# Altium PCB PCB_Main.PcbDoc
Units mm, origin at the board's own origin, x right, y up, seen from the top; angles counter-clockwise.
Board outline 70 x 60 mm, 2 copper layers (Top Layer, Bottom Layer); 12 components, 15 nets, 80 pads, 6 vias.
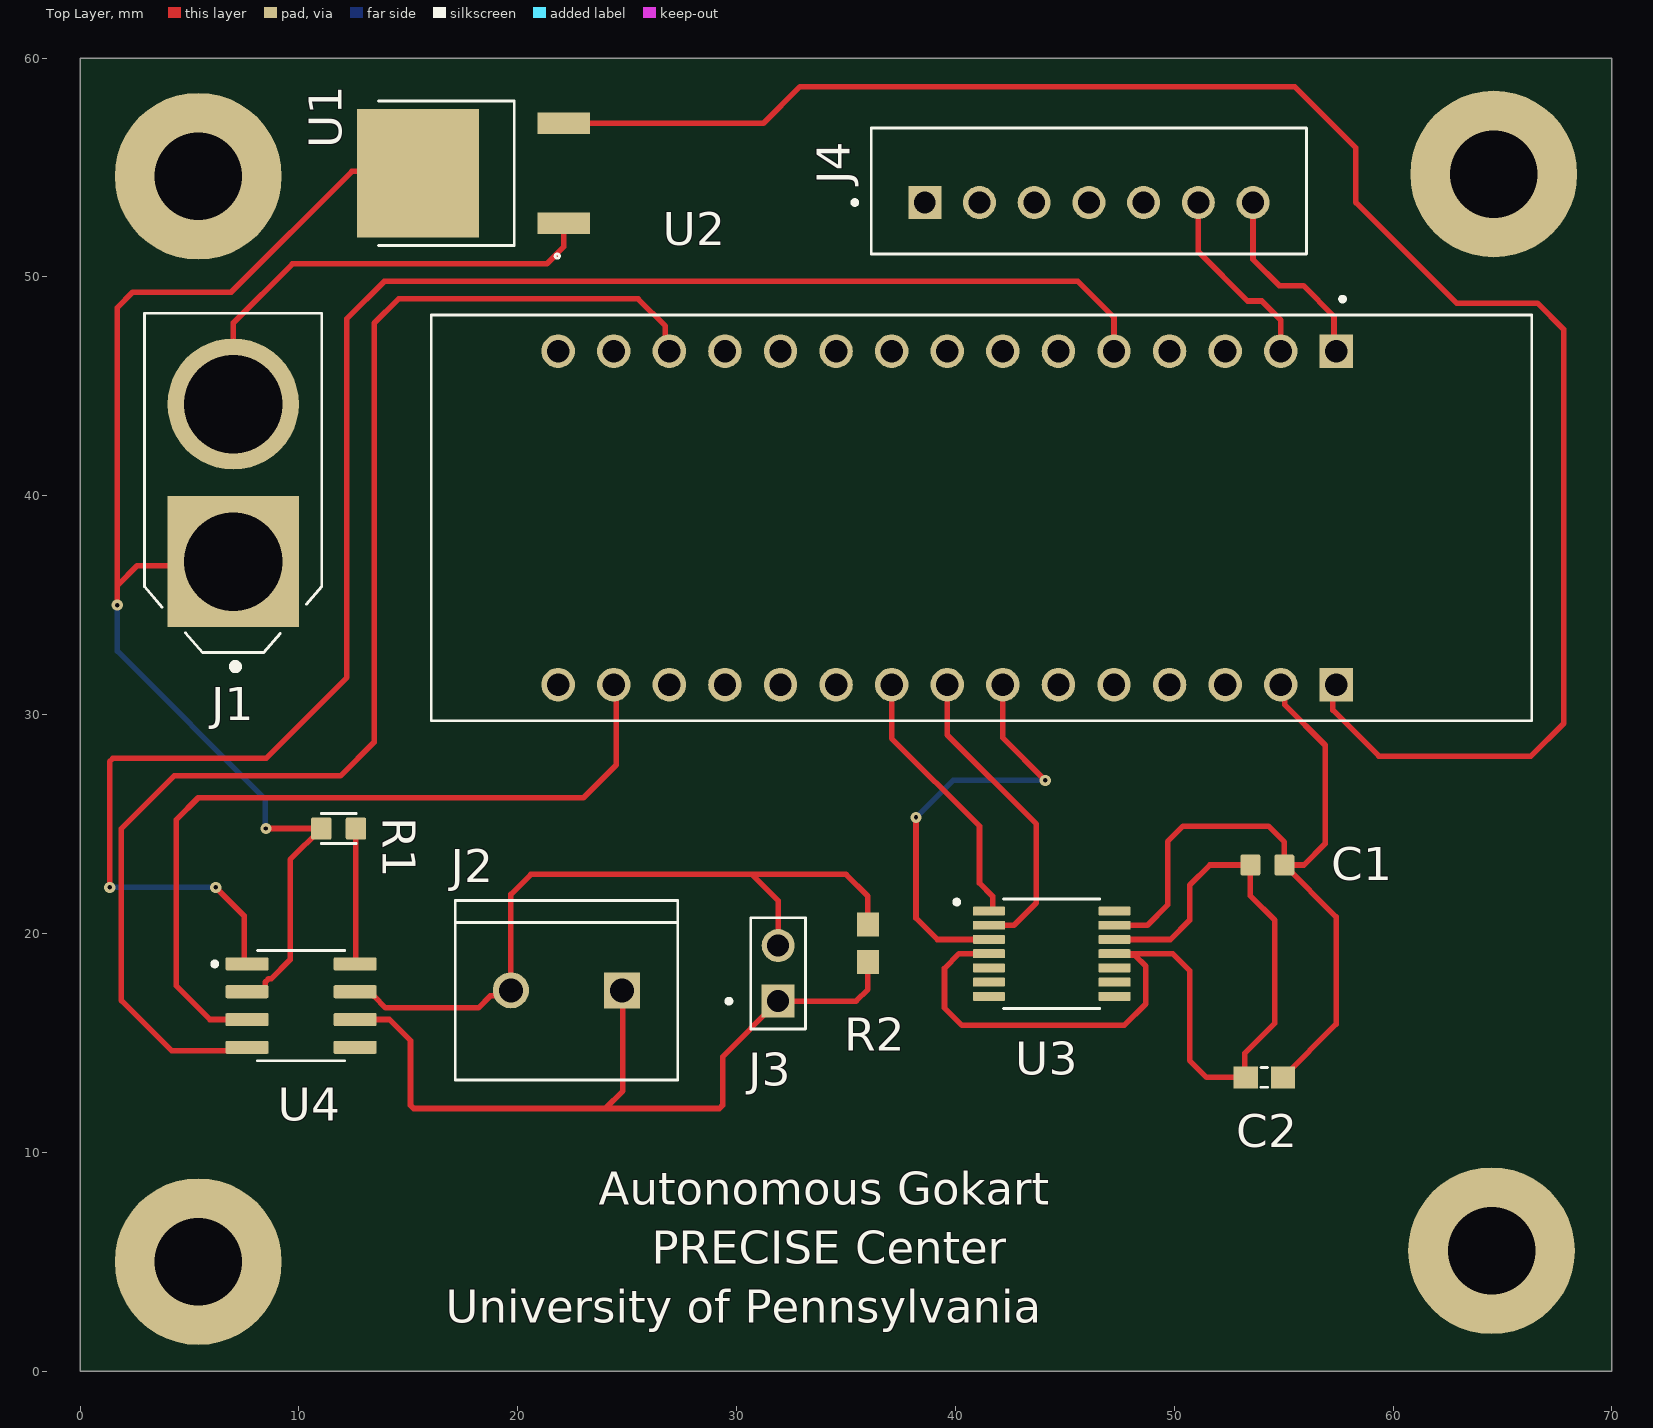
[diagram p0: Top Layer view]
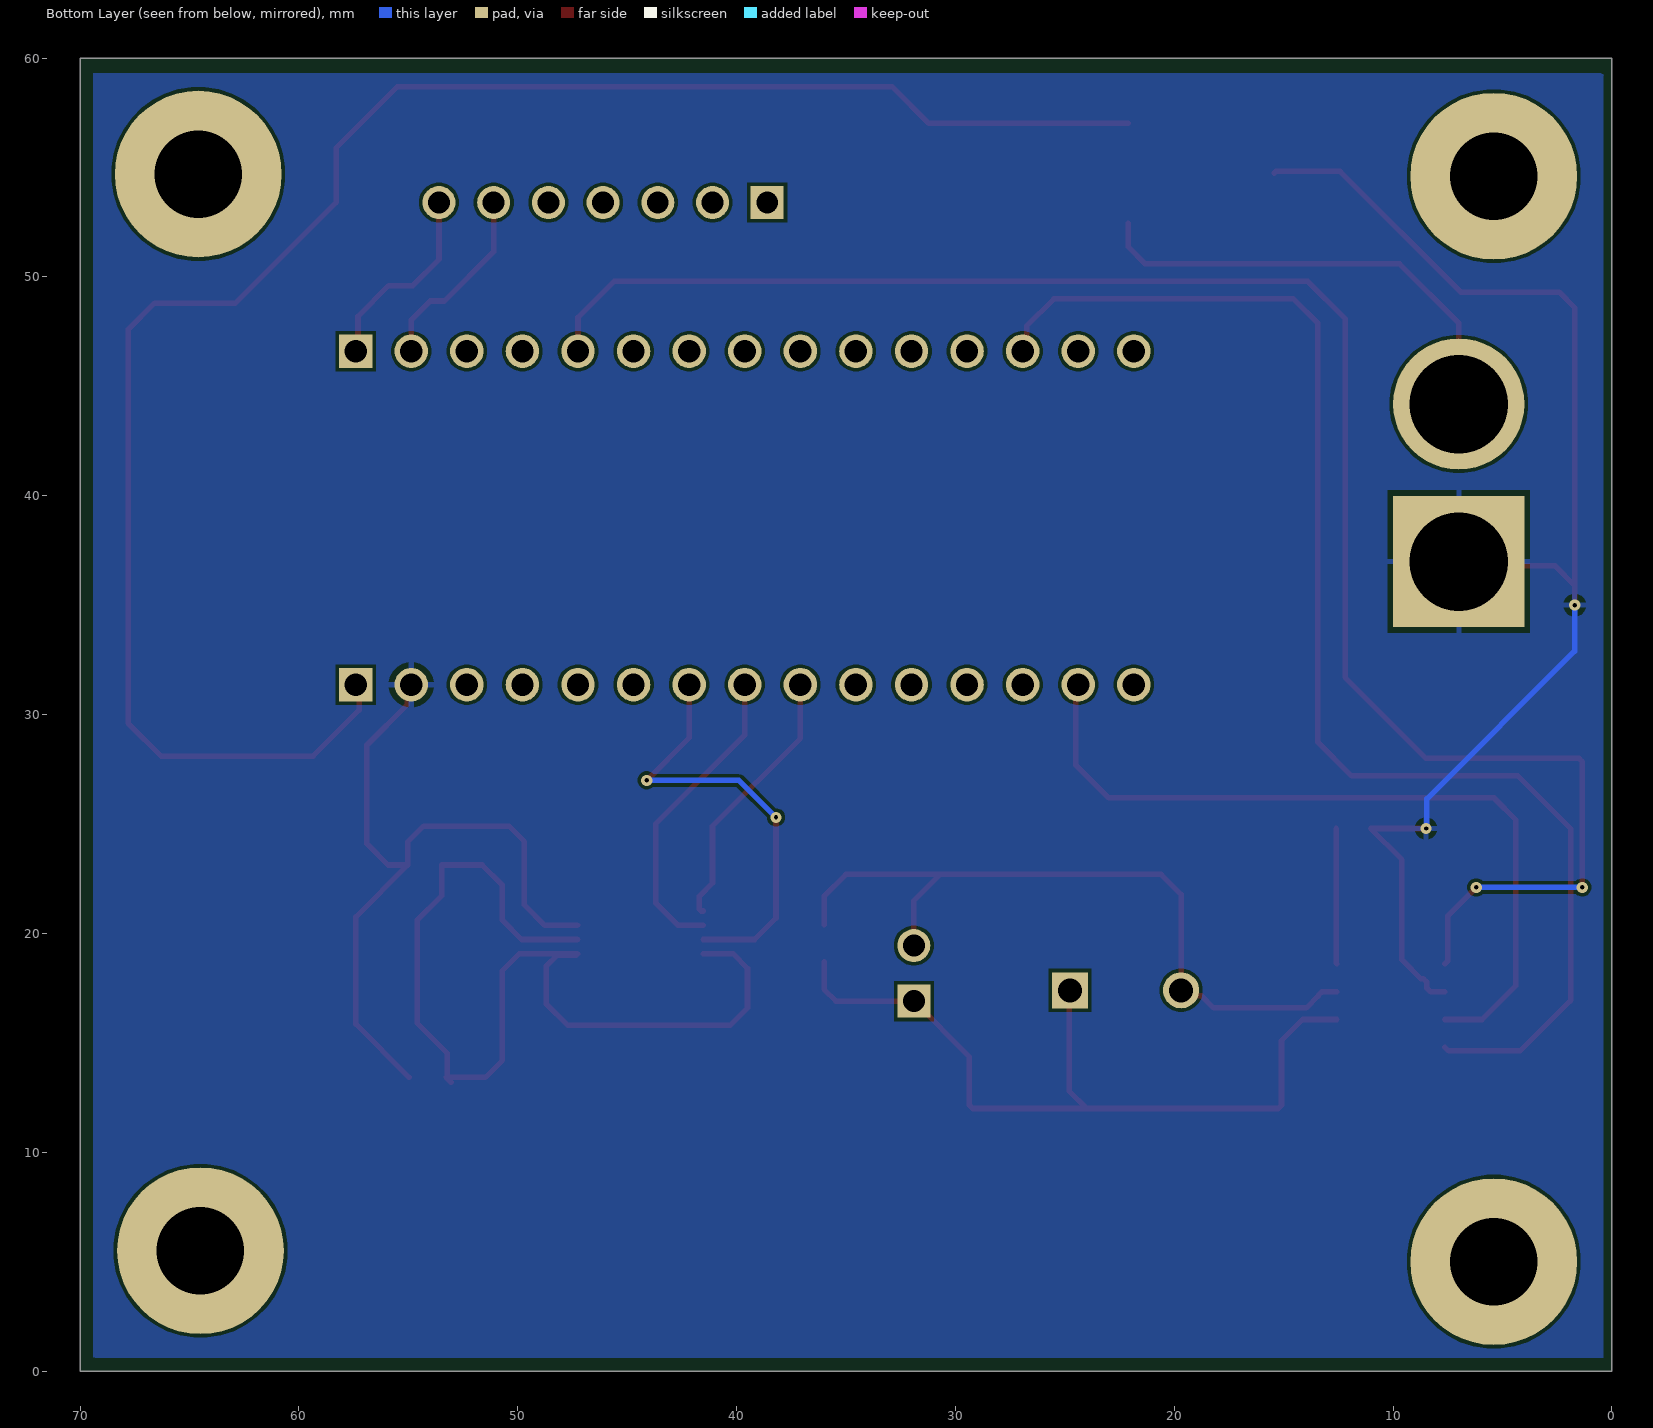
[diagram p1: Bottom Layer view, seen from below]

## Layer stack, top to bottom
Top Solder: solder mask 0.0102, Solder Resist, Dk 3.5
Top Layer: signal copper 0.0356
Dielectric 1: dielectric 0.32, FR-4, Dk 4.8
Bottom Layer: signal copper 0.0356
Bottom Solder: solder mask 0.0102, Solder Resist, Dk 3.5

## Board outline
0,0 70,0 70,60 0,60

## Design rules (kind name [scope] priority, off if disabled: settings)
AssemblyTestPointUsage [All] p1 off:
Clearance [All] p1: gap=0.152 ignorepadtopadclearanceinfootprint=FALSE
FabricationTestPointUsage [All] p1 off: valid=0 allowmultiple=FALSE
HoleSize [All] p1: absolutevalues=TRUE maxlimit=6 minlimit=0.025 maxpercent=80.000 minpercent=20.000
MinimumSolderMaskSliver [All] p1: minsoldermaskwidth=0.102
PolygonConnect [All] p1: connectstyle=Relief reliefconductorwidth=0.254 reliefentries=4 polygonreliefangle="90 Angle" airgapwidth=0.254
RoutingVias [All] p1: holewidth=0.203 width=0.508 viastyle="Through Hole" minholewidth=0.203 minwidth=0.508 maxholewidth=0.762 maxwidth=1.27
SilkToSolderMaskClearance [IsPad] p1: minsilkscreentomaskgap=0.051 clearancetoexposedcopper=TRUE
SolderMaskExpansion [All] p1: expansion=0.102 istentingtop=FALSE
Width [All] p1: maxlimit=0.254 minlimit=0.254 preferedwidth=0.254
25 further rules are at their usual default settings.

## Classes and differential pairs
component class MAIN: C1 C2 J1 J2 J3 J4 R1 R2 U1 U2 U4

## Components (designator, comment, footprint, x,y, rotation, side; value= is the part's Value field where it differs from the comment)
C1 "100nF_Capacitor" 100nF_Capacitor 54.2,23 r0 top
C2 "1uF_Capacitor" 1uF_Capacitor 54.1,13.4 r0 top
J1 "XT60_Connector" XT60_Connector 7.1,40.8 r90 top
J2 "2_pin_Terminal_Block" Terminal_Block 22.1,17.4 r180 top
J3 "Conn_Header" Conn_Header 31.9,18.3 r90 top
J4 "7pin_JSTConnector" 7pin_JSTConnector 46.128,53.452 r0 top (schematic designator *)
R1 "10k_Resistor" 10k_Resistor 11.8,24.8 r180 top
R2 "120ohm_Resistor" 120ohm_Resistor 36.005,19.51 r270 top
U1 "Voltage_Regulator_12-5V" Voltage_Regulator_12-5V 18.288,54.61 r90 top
U2 "Nucleo_L432KC" Nucleo_L432KC 39.954,39.395 r270 top
U3 "Angle_Sensor" Angle_Sensor_AS5047P 44.4,19.2 r0 top
U4 "CAN_Bus_Interface" CAN_Bus_Interface 10.1,16.7 r0 top

## Footprints (in the part's own frame and the unit in brackets; to place one, negate y for a bottom-side part, rotate by r counter-clockwise, add the part's x,y. Pads: shape width x height; smd on the part's side, far side on the other; paste and mask are expansions set on the pad)
1uF_Capacitor [mm]
  rect 1.1x1 smd: 1(-0.834,0.024) 2(0.866,0.024)
  silkscreen extent -0.13,-0.43 0.17,0.47
7pin_JSTConnector [mm]
  rect 1.508x1.508 hole 1: 1(-7.528,-0.052)
  round 1.508 hole 1: 2(-5.028,-0.052) 3(-2.528,-0.052) 4(-0.028,-0.052) 5(2.472,-0.052) 6(4.972,-0.052) 7(7.472,-0.052)
  silkscreen extent -10.83,-2.4 9.92,3.35, body extent -9.98,-2.4 9.92,3.35, height 7
10k_Resistor [mm]
  rrect20% 0.94x1.02 smd: 1(-0.806,0.006) 2(0.774,0.006)
  silkscreen extent -0.82,-0.68 0.78,0.7
100nF_Capacitor [mm]
  rrect25% 0.92x0.97 smd: 1(-0.719,0.127) 2(0.831,0.127)
120ohm_Resistor [mm]
  rect 1.1x1 smd: 1(-0.89,-0.005) 2(0.81,-0.005)
Angle_Sensor_AS5047P [mm]
  rrect25% 1.47x0.41 smd mask+0.05: 1(-2.87,1.823) 2(-2.87,1.173) 3(-2.87,0.523) 4(-2.87,-0.127) 5(-2.87,-0.777) 6(-2.87,-1.427) 7(-2.87,-2.077) 8(2.87,-2.077) 9(2.87,-1.427) 10(2.87,-0.777) 11(2.87,-0.127) 12(2.87,0.523) 13(2.87,1.173) 14(2.87,1.823)
  silkscreen extent -4.44,-2.63 2.2,2.37
CAN_Bus_Interface [mm]
  rrect25% 1.97x0.6 smd: 1(-2.47,1.905) 2(-2.47,0.635) 3(-2.47,-0.635) 4(-2.47,-1.905) 5(2.47,-1.905) 6(2.47,-0.635) 7(2.47,0.635) 8(2.47,1.905)
  silkscreen extent -4.05,-2.52 1.99,2.52
Conn_Header [mm]
  rect 1.508x1.508 hole 1: 1(-1.397,0)
  round 1.508 hole 1: 2(1.143,0)
  silkscreen extent -2.67,-1.25 2.41,2.35
Nucleo_L432KC [mm]
  round 1.53 hole 1.02: CN3_3(-7.209,12.373) CN3_4(-7.209,9.833) CN3_6(-7.209,4.753) CN3_7(-7.209,2.213) CN3_8(-7.209,-0.327) CN3_9(-7.209,-2.867) CN3_10(-7.209,-5.407) CN3_11(-7.209,-7.947) CN3_12(-7.209,-10.487) CN3_14(-7.209,-15.567) CN3_15(-7.209,-18.107) CN4_3(8.031,12.373) CN4_4(8.031,9.833) CN4_5(8.031,7.293) CN4_6(8.031,4.753) CN4_10(8.031,-5.407) CN4_11(8.031,-7.947) CN4_12(8.031,-10.487) CN4_13(8.031,-13.027) CN4_15(8.031,-18.107) ""(-7.209,14.913) ""(-7.209,7.293) ""(-7.209,-13.027) ""(8.031,14.913) ""(8.031,-2.867) ""(8.031,-0.327) ""(8.031,2.213) ""(8.031,-15.567)
  rect 1.53x1.53 hole 1.02: ""(-7.209,17.453) ""(8.031,17.453)
  silkscreen extent -9.69,-23.91 9.68,26.38
Terminal_Block [mm]
  rect 1.65x1.65 hole 1.1: 1(-2.667,0)
  round 1.65 hole 1.1: 2(2.413,0)
  silkscreen extent -5.21,-4.1 4.95,4.1
Voltage_Regulator_12-5V [mm]
  rect 0.98x2.4 smd: 1(-2.153,-3.819) 2(2.407,-3.819)
  rect 5.86x5.57 smd paste-4: 3(0.127,2.851)
  silkscreen extent -3.76,-3.62 3.43,4.65
XT60_Connector [mm]
  rect 6x6 hole 4.5: 1(-3.808,0.103)
  round 6 hole 4.5: 2(3.392,0.103)
  silkscreen extent -8.76,-3.95 7.54,4.15

## Part data
C1: "Multilayer Ceramic Capacitors MLCC - SMD/SMT 100nF 25volts 10%", Capacitance=100nF, Case Code (Imperial)=0603, Case Code (Metric)=1608, Dielectric=X7R, Manufacturer="Vishay Vitramon", Manufacturer Part Number=VJ0603Y104KLXAC5G, Max Operating Temperature=125°C, Min Operating Temperature=-55°C, Package Quantity=4000, Supplier Part Number 1=77-VJ0603Y104KLXAC5G, Tolerance=10%, Voltage Rating (DC)=25V, Case/Package=0603, Category=Uncategorized, ComponentLink1Description=https://datasheet.ciiva.com/13401/highrels-223441-13401989.pdf?src-supplier=Mouser, ComponentLink1URL=https://datasheet.ciiva.com/13401/highrels-223441-13401989.pdf?src-supplier=Mouser, Height=0.92mm, Length=1.6mm, Packaging="Tape and Reel", Pricing 1="1=0.84000, 10=0.71000, 50=0.71000, 100=0.58000, 1000=0.46400, 10000=0.44600 (USD)", RoHS=No, RoHS Compliant=No, Series="VJ HI-REL", Stock 1=2692, Supplier 1=Mouser, Termination=SMD/SMT, Weight=7.1E-05oz, Width=0.8mm
C2: "Multilayer Ceramic Capacitors MLCC - SMD/SMT 1uF 50V 0603 RoHS", Capacitance=1uF, Case Code (Imperial)=0603, Case Code (Metric)=1608, Dielectric=X5R, Manufacturer=Yageo, Manufacturer Part Number=CC0603KRX5R9BB105, Max Operating Temperature=85°C, Min Operating Temperature=-55°C, Package Quantity=4000, Resistor Type=Ceramic, Tolerance=10%, Voltage Rating=50V, Case/Package=0603, Category="Ceramic Capacitors", ComponentLink1Description=http://www.mouser.com/ds/2/447/Yageo_UPY-GP_NP0_16V-to-50V_9-358835.pdf?src-supplier=Mouser, ComponentLink1URL=http://www.mouser.com/ds/2/447/Yageo_UPY-GP_NP0_16V-to-50V_9-358835.pdf?src-supplier=Mouser, ComponentLink2Description=http://www.yageo.com/documents/recent/UPY-GPHC_X5R_4V-to-50V_25.pdf?src-supplier=Digi-Key, ComponentLink2URL=http://www.yageo.com/documents/recent/UPY-GPHC_X5R_4V-to-50V_25.pdf?src-supplier=Digi-Key, Halogen Free="Halogen Free", Lead Free="Lead Free", Length=0.063inch, Mount="Surface Mount", Packaging="Tape and Reel", Pricing 1="1=0.28140, 10=0.19610, 25=0.19410, 100=0.16370, 250=0.16210, 500=0.09730, 1000=0.06680 (USD)", RoHS=Yes, RoHS Compliant=Yes, Stock 1=2780, Supplier 1="Arrow Electronics", Supplier Part Number 1=CC0603KRX5R9BB105, Termination=SMD/SMT, Thickness=0.035inch, Voltage Rating (DC)=50V, Weight=7.1E-05oz, Width=0.031inch
J1: "20.5x8.1mm 铜镀金 DC500V 30A", Manufacturer=Amass, Manufacturer Part Number=XT60-M, Pricing 1="1=0.58000, 20=0.50000, 100=0.44000, 500=0.39000 (EUR)", RoHS=No, Stock 1=14568, Supplier 1=TME, Supplier Part Number 1=XT60-M
J2: "Connector, Terminal Block; Wire Receptacle; 2 Pos.; 16-30 AWG; 0.2 in. CL; Side;", Color=Green, Current=13.5A, Flammability Rating="UL94 V-0", Manufacturer="TE Connectivity", Manufacturer Part Number=282837-2, Max Supply Voltage (AC)=250V, Package Quantity=300, Voltage=300V, Approvals=UL, Category="Terminal Blocks", Closed End="No (Without)", ComponentLink1Description=https://datasheet.ciiva.com/819/eng-cs-1308389-eurostyle-terminal-blocks-0607-819104.pdf?src-supplier=Avnet, ComponentLink1URL=https://datasheet.ciiva.com/819/eng-cs-1308389-eurostyle-terminal-blocks-0607-819104.pdf?src-supplier=Avnet, ComponentLink2Description=https://datasheet.ciiva.com/16305/eng-cs-1308389-eurostyle-terminal-blocks-0607-16305248.pdf?src-supplier=Future+Electronics, ComponentLink2URL=https://datasheet.ciiva.com/16305/eng-cs-1308389-eurostyle-terminal-blocks-0607-16305248.pdf?src-supplier=Future+Electronics, ComponentLink3Description=https://datasheet.ciiva.com/19467/750688-19467564.pdf?src-supplier=Jameco, ComponentLink3URL=https://datasheet.ciiva.com/19467/750688-19467564.pdf?src-supplier=Jameco, ComponentLink4Description=https://datasheet.ciiva.com/11758/0900766b80e7dc97-11758677.pdf?src-supplier=RSComponents, ComponentLink4URL=https://datasheet.ciiva.com/11758/0900766b80e7dc97-11758677.pdf?src-supplier=RSComponents, ComponentLink5Description=https://datasheet.ciiva.com/14606/70086281-14606908.pdf?src-supplier=Allied+Electronics, ComponentLink5URL=https://datasheet.ciiva.com/14606/70086281-14606908.pdf?src-supplier=Allied+Electronics, ComponentLink6Description=https://datasheet.ciiva.com/18620/eng-cd-282837-g3-18620917.pdf?src-supplier=Digi-Key, ComponentLink6URL=https://datasheet.ciiva.com/18620/eng-cd-282837-g3-18620917.pdf?src-supplier=Digi-Key, ComponentLink7Description=https://datasheet.ciiva.com/823/eng-cd-282837-g3-823439.pdf?src-supplier=Digi-Key, ComponentLink7URL=https://datasheet.ciiva.com/823/eng-cd-282837-g3-823439.pdf?src-supplier=Digi-Key, ComponentLink8Description=https://datasheet.ciiva.com/7978/1650926-7978569.pdf?src-supplier=Element14, ComponentLink8URL=https://datasheet.ciiva.com/7978/1650926-7978569.pdf?src-supplier=Element14, ComponentLink9Description=https://datasheet.ciiva.com/30084/eng-cs-1308389-eurostyle-terminal-blocks-0607-30084269.pdf?src-supplier=Onlinecomponents.com, ComponentLink9URL=https://datasheet.ciiva.com/30084/eng-cs-1308389-eurostyle-terminal-blocks-0607-30084269.pdf?src-supplier=Onlinecomponents.com, Connector Type=Receptacle, Contact Material=Brass, Contact Plating=Tin, Current Rating=13.5A, Depth=8.2mm, ELV=Compliant, Gender=Female, Height=11.5mm, Housing Color=Green, Housing Material=Polyamide, Interlock="Yes (With)", Lead Free="Lead Free", Length=10.76mm, Max Current Rating=13.5A, Max Voltage Rating (AC)=250V, Mount="Through Hole", Number of Circuits=2, Number of Contacts=2, Number of Levels=1, Number of Poles=2, Number of Positions=2, Number of Positions Per Level=2, Number of Rows=1, Orientation=Straight, Packaging=Bulk, Pitch=5.08mm, Plating=Brass, Pricing 1="1=0.60770, 10=0.37930, 25=0.37550, 50=0.37180, 100=0.33170, 250=0.33070, 500=0.31670, 1000=0.26460, 5000=0.23620 (USD)", Radiation Hardening=No, REACH SVHC=Unknown, RoHS=Yes, RoHS Compliant=Yes, Screw Flange="No (Without)", Screwless Terminal Block="No (Without)", Side Stackable="Yes (With)", Stock 1=1, Supplier 1="Arrow Electronics", Supplier Part Number 1=282837-2, Tail Length=3.5mm, Termination=Solder, Thread Size=M3, Voltage Rating=250V, Voltage Rating (AC)=250V, Weight=0.059966oz, Width=11.5mm, Wire Gauge (Max)=16AWG, Wire Gauge (Min)=30AWG, Wire/Cable Gauge=30AWG
J3: "Conn Unshrouded Header HDR 2 POS 2.54mm Solder ST Thru-Hole Automotive Carton", Manufacturer="TE Connectivity", Manufacturer Part Number=826629-2, Category="Headers and Wire Housings", ComponentLink1Description=https://www.te.com/commerce/DocumentDelivery/DDEController?Action=srchrtrv&amp;DocNm=826629&amp;DocType=Customer+Drawing&amp;DocLang=English&src-supplier=Digi-Key, ComponentLink1URL=https://www.te.com/commerce/DocumentDelivery/DDEController?Action=srchrtrv&amp;DocNm=826629&amp;DocType=Customer+Drawing&amp;DocLang=English&src-supplier=Digi-Key, Pricing 1="1=0.28240, 10=0.25810, 100=0.23030, 500=0.21410, 1000=0.17470 (USD)", RoHS=Yes, RoHS Compliant=Yes, Stock 1=29511, Supplier 1="Arrow Electronics", Supplier Part Number 1=826629-2
J4: "Connector Header, XH Series, 7 Position, 2.50mm, Through Hole, Press-Fit, Solder, Natural", Color=Natural, Contact Resistance=20mR, Current Rating=3A, Flammability Rating="UL94 V-0", Housing Color=White, Insulation Resistance=1GR, Manufacturer=JST, Manufacturer Part Number=B7B-XH-A(LF)(SN), Max Operating Temperature=85°C, Max Voltage Rating (AC)=250V, Min Operating Temperature=-25°C, Category="Headers and Wire Housings", ComponentLink1Description=https://datasheet.ciiva.com/26894/getdatasheetpartid-440406-26894811.pdf?src-supplier=Verical, ComponentLink1URL=https://datasheet.ciiva.com/26894/getdatasheetpartid-440406-26894811.pdf?src-supplier=Verical, ComponentLink2Description=https://datasheet.ciiva.com/11747/0900766b80826551-11747681.pdf?src-supplier=RSComponents, ComponentLink2URL=https://datasheet.ciiva.com/11747/0900766b80826551-11747681.pdf?src-supplier=RSComponents, Connector Type=Header, Contact Finish - Mating=TIN, Contact Material=Brass, Contact Plating=Copper,Tin,Lead, Contact Shape=Square, Contact Type="Male Pin", Depth=5.75mm, Fastening Type=Detent, Housing Material=Polyamide, Insulation Color=Natural, Insulation Material=Nylon, Lead Free="Lead Free", Lead Pitch=2.5mm, Length=19.9mm, Max Current Rating=3A, Mount="Through Hole", Number of Contacts=7, Number of Positions=7, Number of Rows=1, Orientation=Straight, Packaging=Bulk, Pitch=2.5mm, Pricing 1="1=0.34920, 10=0.30050, 25=0.29750, 50=0.29450, 100=0.23390, 500=0.13360 (USD)", REACH SVHC="No SVHC", RoHS=Yes, Series=XH, Stock 1=3231, Supplier 1="Arrow Electronics", Supplier Part Number 1=B7B-XH-A(LF)(SN), Termination=Solder, Voltage Rating=250V, Voltage Rating (AC)=250V, Wire/Cable Gauge=22AWG
R1: "Res Thin Film 0603 10K Ohm 0.1% 0.167W ±25ppm/C Epoxy Pad SMD T/R", Case Code (Imperial)=0603, Case Code (Metric)=1608, Manufacturer="TE Connectivity", Manufacturer Part Number=RP73PF1J10KBTDF, Max Operating Temperature=155°C, Max Power Dissipation=167mW, Min Operating Temperature=-55°C, Package Quantity=1000, Power Rating=166mW, Resistance=10kR, Resistance Tolerance=0.1%, Resistor Type="Thin Film", Temperature Coefficient=25ppm/°C, Voltage Rating=100V, Case/Package=0603, Category="Chip SMD Resistors", ComponentLink1Description=https://datasheet.ciiva.com/2546/eng-cd-1625867-ba-2546174.pdf?src-supplier=Digi-Key, ComponentLink1URL=https://datasheet.ciiva.com/2546/eng-cd-1625867-ba-2546174.pdf?src-supplier=Digi-Key, Construction=Rectangular, Depth=0.8mm, Height=0.022inch, Length=1.55mm, Military Standard=Not, Number of Terminations=2, Packaging="Tape and Reel", Pricing 1="1000=0.17420, 2000=0.16290 (USD)", Radiation Hardening=No, REACH SVHC="No SVHC", RoHS=Yes, RoHS Compliant=Yes, Series="RP73P, Holsworthy", Stock 1=5000, Supplier 1="Arrow Electronics", Supplier Part Number 1=RP73PF1J10KBTDF, Technology="THIN FILM", Termination=Flat, Tolerance=0.1%, Width=0.031inch
R2: "Res Thick Film 0603 120 Ohm 1% 1/10W ±100ppm/°C Molded SMD SMD Paper T/R", Case Code (Imperial)=0603, Case Code (Metric)=1608, Manufacturer=Yageo, Manufacturer Part Number=RC0603FR-10120RL, Max Operating Temperature=155°C, Min Operating Temperature=-55°C, Power Rating=100mW, Resistance=120R, Resistor Type="Thick Film", Supplier Part Number 1=13-RC0603FR-10120RLCT-ND, Temperature Coefficient=100ppm/°C, Tolerance=1%, Voltage Rating=50V, Case/Package=0603, Category="Chip SMD Resistors", ComponentLink1Description=https://datasheet.ciiva.com/12561/rc0603-272842-12561679.pdf?src-supplier=Mouser, ComponentLink1URL=https://datasheet.ciiva.com/12561/rc0603-272842-12561679.pdf?src-supplier=Mouser, Construction=Rectangular, Contact Plating=Tin,Matte, Depth=0.8mm, Height=0.45mm, Length=1.6mm, Military Standard=Not, Packaging="Tape and Reel", Pricing 1="1=0.10000, 10=0.02300, 100=0.00930, 1000=0.00417, 2500=0.00362, 5000=0.00299 (USD)", Radiation Hardening=No, RoHS=Yes, RoHS Compliant=Yes, Series=RC, Stock 1=93117, Supplier 1=Digi-Key, Termination=SMD/SMT, Width=0.8mm
U1: "IC REG LDO 5V 1.5A DPAK", Case/Package=TO-252, Dropout Voltage=2V, Manufacturer=STMicroelectronics, Manufacturer Part Number=L7805CDT-TR, Max Input Voltage=35V, Max Operating Temperature=125°C, Max Output Current=1.5A, Min Input Voltage=7V, Min Operating Temperature=0°C, Min Output Voltage=5V, Package Quantity=1, Power Supply Rejection Ratio (PSRR)=62dB, Quiescent Current=8mA, Category="Voltage Regulators - Linear", ComponentLink1Description=https://datasheet.ciiva.com/2042/cd00000444-2042784.pdf?src-supplier=Digi-Key, ComponentLink1URL=https://datasheet.ciiva.com/2042/cd00000444-2042784.pdf?src-supplier=Digi-Key, ComponentLink2Description=https://datasheet.ciiva.com/2042/cd00000444-2042783.pdf?src-supplier=Digi-Key, ComponentLink2URL=https://datasheet.ciiva.com/2042/cd00000444-2042783.pdf?src-supplier=Digi-Key, ComponentLink3Description=https://datasheet.ciiva.com/2042/cd00000444-2042785.pdf?src-supplier=Digi-Key, ComponentLink3URL=https://datasheet.ciiva.com/2042/cd00000444-2042785.pdf?src-supplier=Digi-Key, ComponentLink4Description=https://datasheet.ciiva.com/4882/cd00000444-4882231.pdf?src-supplier=Mouser, ComponentLink4URL=https://datasheet.ciiva.com/4882/cd00000444-4882231.pdf?src-supplier=Mouser, ComponentLink5Description=https://datasheet.ciiva.com/16357/cd00000444-16357893.pdf?src-supplier=Future+Electronics, ComponentLink5URL=https://datasheet.ciiva.com/16357/cd00000444-16357893.pdf?src-supplier=Future+Electronics, Contact Plating=Tin,Matte, Height=2.4mm, Lead Free="Lead Free", Length=6.6mm, Mount="Surface Mount", Number of Outputs=1, Number of Pins=3, Number of Regulators=1, Output Current=1.5A, Output Type=Fixed, Output Voltage=5V, Packaging="Tape and Reel", Polarity=Positive, Pricing 1="1=0.85320, 10=0.71710, 25=0.71000, 100=0.54440, 250=0.53900 (USD)", Radiation Hardening=No, RoHS=Yes, RoHS Compliant=Yes, Series=-, Stock 1=15, Supplier 1="Arrow Electronics", Supplier Part Number 1=L7805CDT-TR, Width=6.2mm
U2: "STM32 Nucleo-32 development board with STM32L432KC MCU, supports Arduino connectivity", Manufacturer=STMicroelectronics, Manufacturer Part Number=NUCLEO-L432KC, Supplier Part Number 1=1438574, Category="Embedded Processors and Controllers", ComponentLink1Description=http://www.farnell.com/datasheets/2064195.pdf?src-supplier=Farnell, ComponentLink1URL=http://www.farnell.com/datasheets/2064195.pdf?src-supplier=Farnell, ComponentLink2Description=http://www.st.com/content/ccc/resource/technical/document/data_brief/b1/d8/13/d4/b0/b7/4b/6e/DM00214578.pdf/files/DM00214578.pdf/jcr:content/translations/en.DM00214578.pdf?src-supplier=Digi-Key, ComponentLink2URL=http://www.st.com/content/ccc/resource/technical/document/data_brief/b1/d8/13/d4/b0/b7/4b/6e/DM00214578.pdf/files/DM00214578.pdf/jcr:content/translations/en.DM00214578.pdf?src-supplier=Digi-Key, ComponentLink3Description=http://www.farnell.com/datasheets/2064195.pdf?src-supplier=Element14, ComponentLink3URL=http://www.farnell.com/datasheets/2064195.pdf?src-supplier=Element14, Core Architecture=ARM, Evaluation Kit=Yes, Lead Free="Lead Free", Number of Bits=32, Pricing 1="1=9.90000 (GBP)", REACH SVHC="No SVHC", RoHS=Yes, Stock 1=874, Supplier 1=RSComponents
U3: "AS5047P Series 5.5 V 14-bit On-Axis Magnetic Rotary Position Sensor - TSSOP-14", Manufacturer=ams, Manufacturer Part Number=AS5047P-ATSM, Supplier Part Number 1=2009463, Built in Switch=No, Category="Magnetic Sensors", ComponentLink1Description=https://www.mouser.com/ds/2/588/AS5047P_DS000324_2-00-606067.pdf?src-supplier=Mouser, ComponentLink1URL=https://www.mouser.com/ds/2/588/AS5047P_DS000324_2-00-606067.pdf?src-supplier=Mouser, ComponentLink2Description=https://ams.com/documents/20143/36005/AS5047P_DS000324_2-00.pdf?src-supplier=Digi-Key, ComponentLink2URL=https://ams.com/documents/20143/36005/AS5047P_DS000324_2-00.pdf?src-supplier=Digi-Key, ComponentLink3Description=http://ams.com/eng/content/download/725051/1853902/379375?src-supplier=Digi-Key, ComponentLink3URL=http://ams.com/eng/content/download/725051/1853902/379375?src-supplier=Digi-Key, Detent=No, Encoder Type=Magnetic, Lead Free="Lead Free", Mount="Surface Mount", Output Type=PWM, Pricing 1="500=4.57300 (GBP)", RoHS=Yes, RoHS Compliant=Yes, Stock 1=554, Supplier 1=RSComponents, Termination=SMD/SMT
U4: "the sn65hvd230 sn65hvd231 and sn65hvd232 controller area network (can) transceivers are designed for use with the...", Manufacturer="Texas Instruments", Manufacturer Part Number=SN65HVD230, Supplier Part Number 1=670012-SN65HVD230, Pricing 1="11=4.96000, 25=4.11400, 38=3.99300, 52=3.87200, 67=3.75100, 89=3.38800 (USD)", RoHS=No, Stock 1=299600, Supplier 1="Win Source Electronics"

## Free pads (board coordinates)
  round 7.62 hole 4: 1(5.4,54.6) 2(64.6,54.7) 3(5.4,5) 4(64.5,5.5)

## Via types
v1: diameter 0.508, hole 0.203, Top Layer to Bottom Layer, tented both sides, 6 vias

## Nets (pads, with @x,y where several pads share a name; then routed paths per layer and width w, separated by ;. In a path a pad name is that pad's centre, name@x,y a point inside that pad or via, vN(x,y) a via of type N, cw(c..) or ccw(c..) an arc to the next point about the centre after c; other vN are vias at no path point)
3V3: U2.@24.387,31.364 U4.3 | length 36.3
  Top Layer w0.254: U4.3 5.935,16.065 4.4,17.6 4.4,25.2 5.4,26.2 23,26.2 24.5,27.7 24.5,31.252 U2.@24.387,31.364
CAN_D: U2.@47.247,46.604 U4.1 | length 81.5
  Top Layer w0.254: v1(1.353,22.1) 1.353,27.851 1.502,28 8.5,28 12.195,31.695 12.195,48.095 13.9,49.8 45.6,49.8 47.247,48.153 U2.@47.247,46.604 ; v1(6.2,22.1) 7.5,20.8 7.5,18.735 U4.1
  Bottom Layer w0.254: v1(1.353,22.1) v1(6.2,22.1)
CAN_R: U2.@26.927,46.604 U4.4 | length 62.5
  Top Layer w0.254: U4.4 7.463,14.628 4.192,14.628 1.887,16.933 1.887,24.787 4.3,27.2 11.9,27.2 13.437,28.737 13.437,47.885 14.552,49 25.5,49 26.75,47.75 26.75,46.782 U2.@26.927,46.604
CSn: U2.@37.087,31.364 U3.1 | length 12.4
  Top Layer w0.254: U2.@37.087,31.364 37.087,28.913 41.1,24.9 41.1,22.3 41.7,21.7 41.7,21.101 41.622,21.023 U3.1
GND: C1.2 C2.2 J1.1 R1.2 U1.3 U2.@54.867,31.364 U3.13 U4.2 | length 97.1
  Top Layer w0.254: v1(1.7,35) 1.7,35.9 ; U4.2 8.289,17.335 8.462,17.508 8.462,17.775 8.61,17.924 8.729,17.924 9.6,18.795 9.6,23.368 R1.2 v1(8.494,24.794) ; J1.1@8.1,36.8 2.6,36.8 1.7,35.9 ; J1.1@8.1,37.3 J1.1@8.6,36.8 ; U1.3 15.354,54.82 12.42,54.82 6.9,49.3 2.4,49.3 1.7,48.6 1.7,35.9 ; U3.13 48.773,20.373 49.7,21.3 49.7,24.2 50.4,24.9 54.3,24.9 55.031,24.169 C1.2 ; U2.@54.867,31.364 55.058,31.174 55.058,30.442 56.9,28.6 56.9,24.1 55.927,23.127 C1.2 ; C2.2 57.4,15.858 57.4,20.758 C1.2
  Bottom Layer w0.254: v1(1.7,35) 1.7,32.9 8.455,26.145 8.455,24.833 v1(8.494,24.794)
MISO: U2.@42.167,31.364 U3.3 | length 20.1
  Top Layer w0.254: v1(38.2,25.3) 38.2,20.7 39.177,19.723 U3.3 ; U2.@42.167,31.364 42.167,28.933 v1(44.106,26.994)
  Bottom Layer w0.254: v1(38.2,25.3) 39.894,26.994 v1(44.106,26.994)
MOSI: C1.1 C2.1 U3.4 U3.11 U3.12 | length 47.7
  Top Layer w0.254: U3.4 40.173,19.073 39.5,18.4 39.5,16.6 40.3,15.8 47.713,15.8 48.7,16.787 48.7,18.5 48.205,18.995 47.348,18.995 U3.11 49.927,19.073 50.7,18.3 50.7,14.2 51.476,13.424 53.216,13.424 53.216,14.516 54.6,15.9 54.6,20.6 53.481,21.719 C1.1 51.627,23.127 50.7,22.2 50.7,20.6 49.823,19.723 U3.12 ; C2.1@53.042,13.2 C2.1
Net*_6: J4.6 U2.@54.867,46.604 | length 8.7
  Top Layer w0.254: J4.6 51.1,51.15 53.35,48.9 54,48.9 54.867,48.033 U2.@54.867,46.604
Net*_7: J4.7 U2.@57.407,46.604 | length 9
  Top Layer w0.254: J4.7 53.6,50.8 54.8,49.6 55.9,49.6 57.3,48.2 57.3,46.712 U2.@57.407,46.604
NetJ1_2: J1.2 U1.1 | length 21.3
  Top Layer w0.254: J1.2 6.997,47.897 9.7,50.6 21.324,50.6 22.107,51.383 U1.1
NetJ2_1: J2.1 J3.1 R2.2 U4.6 | length 37.4
  Top Layer w0.254: U4.6 14.135,16.065 15.1,15.1 15.1,12.149 15.249,12 24,12 ; J2.1 24.8,17.367 24.8,12.8 24,12 ; R2.2 36,17.445 35.458,16.903 J3.1 29.359,14.362 29.359,12.149 29.21,12 24,12
NetJ2_2: J2.2 J3.2 R2.1 U4.7 | length 34.3
  Top Layer w0.254: U4.7 13.255,17.335 13.428,17.162 13.428,17.136 13.964,16.6 18.2,16.6 18.745,17.145 19.432,17.145 J2.2 19.687,21.787 20.6,22.7 30.7,22.7 ; J3.2 31.9,21.5 30.7,22.7 ; R2.1 36,21.7 35,22.7 30.7,22.7
NetR1_1: R1.1 U4.8 | length 6.2
  Top Layer w0.254: U4.8 12.606,18.641 R1.1
SCLK: U2.@39.627,31.364 U3.2 | length 14.2
  Top Layer w0.254: U2.@39.627,31.364 39.627,29.073 43.7,25 43.7,21.4 42.673,20.373 U3.2
VOUT: U1.2 U2.@57.407,31.364 | length 83.7
  Top Layer w0.254: U1.2 31.217,57.017 32.9,58.7 55.5,58.7 58.3,55.9 58.3,53.4 62.9,48.8 66.6,48.8 67.8,47.6 67.8,29.6 66.3,28.1 59.349,28.1 57.249,30.2 57.249,31.206 U2.@57.407,31.364
pads on no net: J4.1 J4.2 J4.3 J4.4 J4.5 U2.CN3_3 U2.CN3_4 U2.CN3_6 U2.CN3_7 U2.CN3_8 U2.CN3_9 U2.CN3_10 U2.CN3_11 U2.CN3_12 U2.CN3_14 U2.CN3_15 U2.CN4_3 U2.CN4_4 U2.CN4_5 U2.CN4_6 U2.CN4_10 U2.CN4_11 U2.CN4_12 U2.CN4_13 U2.CN4_15 U3.5 U3.6 U3.7 U3.8 U3.9 U3.10 U3.14 U4.5

## Polygon pours and split planes (outlines as drawn)
GND on Bottom Layer "NONET_L-01_P-001" (solid, remove dead copper, pour order 1): 0.3,59.5 0.5,59.3 69.4,59.3 69.4,0.5 69.3,0.6 0.4,0.6 0.4,59.2 0.3,59.3

## Silkscreen, mask and mechanical layers (free items; w line width, h text height)
Top Overlay:
  text "Autonomous Gokart" at 23.7,7.6 h1.5
  text "PRECISE Center" at 26.128,4.9 h1.5
  text "University of Pennsylvania" at 16.706,2.2 h1.5
Drill Drawing:
  circle w0.254: c-22.844,97.4 r0.847
  lines w0.254: -23.691,94.437 -21.997,94.437 -22.844,92.744 -23.691,94.437 ; -23.691,100.364 -22.844,100.787 -21.997,100.364 -22.421,101.21 -21.997,102.057 -22.844,101.633 -23.691,102.057 -23.267,101.21 -23.691,100.364 ; -23.691,104.597 -23.267,104.597 -23.267,104.174 -22.421,104.174 -22.421,104.597 -21.997,104.597 -21.997,105.443 -22.421,105.443 -22.421,105.867 -23.267,105.867 -23.267,105.443 -23.691,105.443 -23.691,104.597 ; -23.691,107.984 -21.997,107.984 -21.997,109.677 -23.691,109.677 -23.691,107.984 ; -23.691,112.217 -23.267,112.217 -22.844,111.794 -22.421,112.217 -21.997,112.217 -22.421,112.64 -21.997,113.063 -22.421,113.063 -22.844,113.487 -23.267,113.063 -23.691,113.063 -23.267,112.64 -23.691,112.217
  lines w0.381: -25.209,91.601 244.565,91.601 ; -25.209,114.461 244.565,114.461 ; -11.217,87.791 -11.217,118.271 ; 2.495,87.791 2.495,118.271 ; 31.697,87.791 31.697,118.271 ; 44.546,87.791 44.546,118.271 ; 63.184,87.791 63.184,118.271 ; 101.273,87.791 101.273,118.271 ; 116.255,87.791 116.255,118.271 ; 135.198,87.791 135.198,118.271 ; 153.989,87.791 153.989,118.271 ; 175.675,87.791 175.675,118.271 ; 209.549,87.791 209.549,118.271 ; -25.209,87.791 244.565,87.791 244.565,118.271 -25.209,118.271 -25.209,87.791
  text "Symbol" at -22.924,115.604 h1.83
  text "Count" at -10.074,115.604 h1.83
  text "Hole Size" at 3.638,115.604 h1.83
  text "Plated" at 32.84,115.604 h1.83
  text "Hole Type" at 45.689,115.604 h1.83
  text "Drill Layer Pair" at 64.327,115.604 h1.83
  text "Via/Pad" at 102.416,115.604 h1.83
  text "Pad Shape" at 117.398,115.604 h1.83
  text "Template" at 136.341,115.604 h1.83
  text "Description" at 155.132,115.604 h1.83
  text "Hole Tolerance (+)" at 176.818,115.604 h1.83
  text "Hole Tolerance (-)" at 210.692,115.604 h1.83
  text "2" at -10.074,111.794 h1.52
  text "1.100mm (43.31mil)" at 3.638,111.794 h1.52
  text "PTH" at 32.84,111.794 h1.52
  text "Round" at 45.689,111.794 h1.52
  text "Top Layer - Bottom Layer" at 64.327,111.794 h1.52
  text "Pad" at 102.416,111.794 h1.52
  text "(Mixed)" at 117.398,111.794 h1.52
  text "(Mixed)" at 136.341,111.794 h1.52
  text "2" at -10.074,107.984 h1.52
  text "4.500mm (177.17mil)" at 3.638,107.984 h1.52
  text "PTH" at 32.84,107.984 h1.52
  text "Round" at 45.689,107.984 h1.52
  text "Top Layer - Bottom Layer" at 64.327,107.984 h1.52
  text "Pad" at 102.416,107.984 h1.52
  text "(Mixed)" at 117.398,107.984 h1.52
  text "(Mixed)" at 136.341,107.984 h1.52
  text "4" at -10.074,104.174 h1.52
  text "4.000mm (157.48mil)" at 3.638,104.174 h1.52
  text "PTH" at 32.84,104.174 h1.52
  text "Round" at 45.689,104.174 h1.52
  text "Top Layer - Bottom Layer" at 64.327,104.174 h1.52
  text "Pad" at 102.416,104.174 h1.52
  text "Rounded" at 117.398,104.174 h1.52
  text "c762h400" at 136.341,104.174 h1.52
  text "6" at -10.074,100.364 h1.52
  text "0.203mm (8.00mil)" at 3.638,100.364 h1.52
  text "PTH" at 32.84,100.364 h1.52
  text "Round" at 45.689,100.364 h1.52
  text "Top Layer - Bottom Layer" at 64.327,100.364 h1.52
  text "Via" at 102.416,100.364 h1.52
  text "Rounded" at 117.398,100.364 h1.52
  text "v51h20m0mx0" at 136.341,100.364 h1.52
  text "9" at -10.074,96.554 h1.52
  text "1.000mm (39.37mil)" at 3.638,96.554 h1.52
  text "PTH" at 32.84,96.554 h1.52
  text "Round" at 45.689,96.554 h1.52
  text "Top Layer - Bottom Layer" at 64.327,96.554 h1.52
  text "Pad" at 102.416,96.554 h1.52
  text "(Mixed)" at 117.398,96.554 h1.52
  text "(Mixed)" at 136.341,96.554 h1.52
  text "30" at -10.074,92.744 h1.52
  text "1.020mm (40.16mil)" at 3.638,92.744 h1.52
  text "PTH" at 32.84,92.744 h1.52
  text "Round" at 45.689,92.744 h1.52
  text "Top Layer - Bottom Layer" at 64.327,92.744 h1.52
  text "Pad" at 102.416,92.744 h1.52
  text "(Mixed)" at 117.398,92.744 h1.52
  text "(Mixed)" at 136.341,92.744 h1.52
  text "53 Total" at -10.074,88.934 h1.52

## Dimensions
0,0 to 0,60 on Top Layer
0,0 to 70,0 on Top Layer